# EAGLE board transmiter switch (EAGLE 6.5.0)
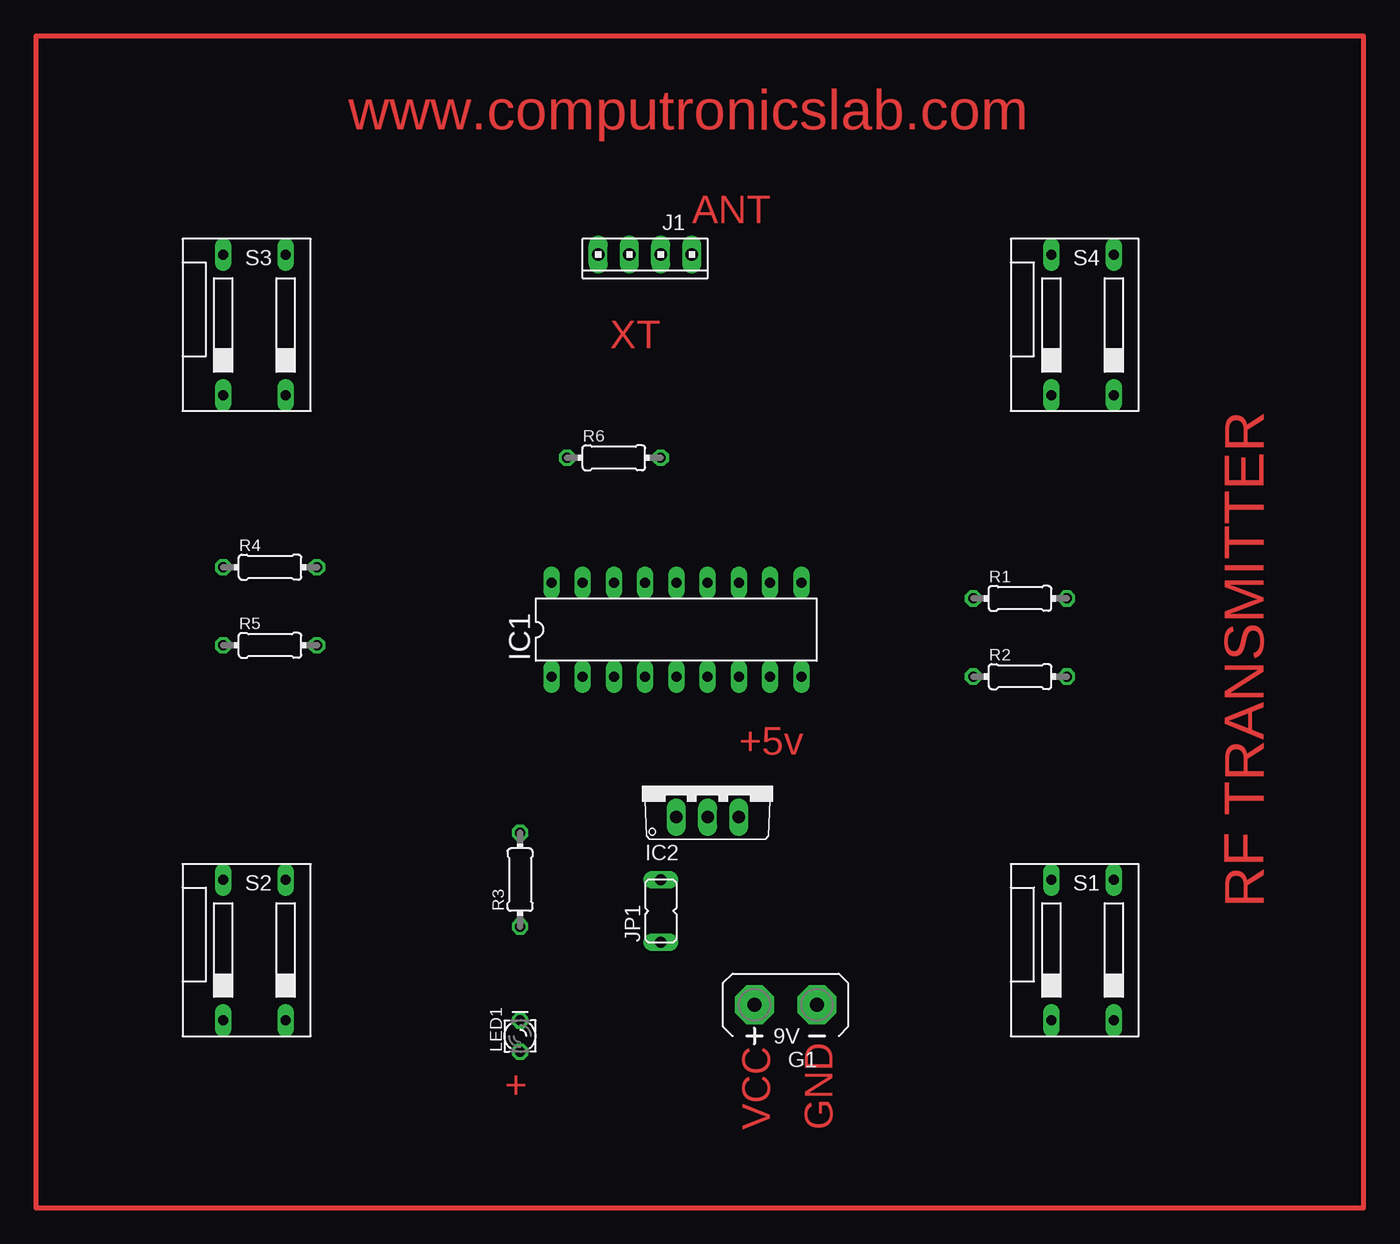
[diagram p0: board, top side]
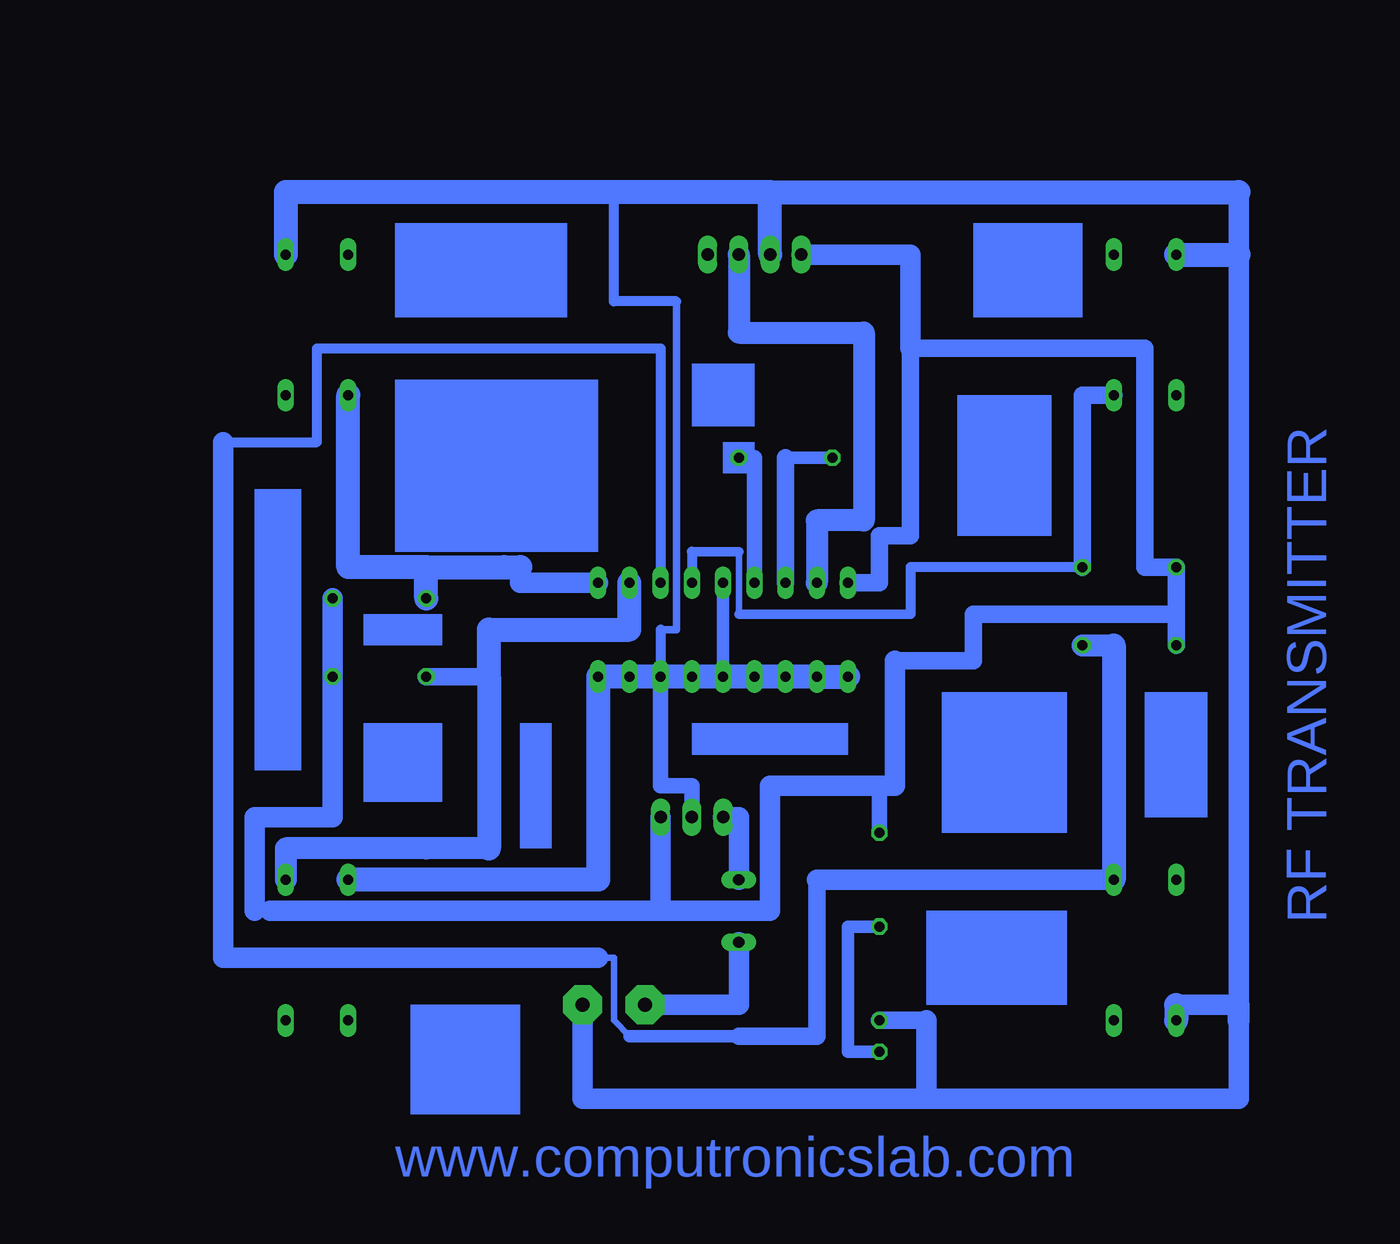
[diagram p1: board, bottom side, seen from below]

No outline drawn. Coordinates in mm, seen from the top.
Copper layers (1*16): Top 0.035mm / dielectric 1.5mm / Bottom 0.035mm
Design rules "default": minimum track width 10mil, minimum drill 24mil, track to track 8mil, track to pad 8mil, pad to pad 8mil, via to via 8mil, smd to smd 8mil, copper to edge 40mil, drill to drill 8mil, minimum pad ring 10mil, minimum via ring 8mil, stop-mask expansion 4mil, vias tented up to drill 0mil, thermal gap 10mil

## Footprints (pad centres in the part's own frame; a part is rotated, then mirrored left to right if it is on the bottom)
AB9V = drill 1.118 pad 3.15 octagon: + 0,2.54; - 0,-2.54
DIL18 = drill 0.813 long: 1 -10.16,-3.81; 2 -7.62,-3.81; 3 -5.08,-3.81; 4 -2.54,-3.81; 5 0,-3.81; 6 2.54,-3.81; 7 5.08,-3.81; 8 7.62,-3.81; 9 10.16,-3.81; 10 10.16,3.81; 11 7.62,3.81; 12 5.08,3.81; 13 2.54,3.81; 14 0,3.81; 15 -2.54,3.81; 16 -5.08,3.81; 17 -7.62,3.81; 18 -10.16,3.81
TO220V = drill 1.016 long: 1 -2.54,-2.54; 2 0,-2.54; 3 2.54,-2.54
10X04MTA = drill 1.016 long: 1 3.81,0; 2 1.27,0; 3 -1.27,0; 4 -3.81,0
JP1 = drill 0.914 long: 1 0,-2.54; 2 0,2.54
LED_LD260 = drill 0.813 octagon: A -1.27,0; K 1.27,0
0204/7 = drill 0.813 octagon: 1 -3.81,0; 2 3.81,0
DS-02 = drill 0.813 long: 1 -5.08,-5.08; 2 0,-5.08; 3 0,6.35; 4 -5.08,6.35

## Placement (x,y rotation side)
G1  AB9V  [AB9V]  57.15,11.43 90 top
IC1  HT12E  [DIL18]  48.26,41.91 0 top
IC2  7805TV  [TO220V]  50.8,29.21 0 top
J1  transmitter  [10X04MTA]  45.72,72.39 180 top
JP1  jumper  [JP1]  46.99,19.05 0 top
LED1  5mm  [LED_LD260]  35.56,8.89 90 top
R1  1k  [0204/7]  76.2,44.45 0 top
R2  1k  [0204/7]  76.2,38.1 0 top
R3  330E  [0204/7]  35.56,21.59 90 top
R4  1k  [0204/7]  15.24,46.99 0 top
R5  1k  [0204/7]  15.24,40.64 0 top
R6  1ME  [0204/7]  43.18,55.88 0 top
S1  push switch 1  [DS-02]  83.82,15.24 0 top
S2  push switch2  [DS-02]  16.51,15.24 0 top
S3  push switch 3  [DS-02]  16.51,66.04 0 top
S4  push switch 4  [DS-02]  83.82,66.04 0 top

## Library data of the parts
G1 = battery
IC1 = microchip
IC2 = linear
J1 = con-amp
JP1 = jumper
LED1 = eagle-ltspice; SPICEMODEL: NONE; SPICEPREFIX: D; SPICETYPE: diode
R1-R6 = eagle-ltspice; SPICEMODEL: NONE; SPICEPREFIX: R
S1-S4 = switch-dil; OC_FARNELL: 9472126; OC_NEWARK: unknown

## Nets
N$1: LED1.A R3.1
N$2: IC1.10 R1.1 S4.1
N$3: IC1.11 R2.1 S1.3
N$4: IC1.12 R5.2 S2.3
N$5: IC1.13 R4.2 S3.2
N$6: IC1.16 R6.1
N$7: IC1.15 R6.2
N$8: IC1.18 IC2.3 J1.1 R1.2 R2.2 R3.2 R4.1 R5.1
N$9: IC1.17 J1.3
N$10: G1.- IC1.1 IC1.2 IC1.3 IC1.4 IC1.5 IC1.6 IC1.7 IC1.8 IC1.9 IC1.14 IC2.2 J1.2 LED1.K S1.4 S2.1 S3.4 S4.3
N$11: G1.+ JP1.1
N$13: IC2.1 JP1.2

## Tracks (layer width: path | path; a pad name or v marks a point on that pad's centre or on a via)
N$1
  Bottom 1.016: LED1.A 38.1,7.62 38.1,17.78 R3.1
N$2
  Bottom 1.676: IC1.10 64.77,45.72 64.77,46.99
  Bottom 1.93: R1.1 72.39,46.99 | 72.39,46.99 66.04,46.99 64.77,46.99 | 72.39,46.99 78.74,46.99 S4.1
N$3
  Bottom 1.422: R2.1 67.31,38.1
  Bottom 1.778: S1.3 83.82,24.13 72.39,24.13 67.31,24.13
  Bottom 1.93: IC1.11 55.88,41.91 67.31,41.91 67.31,38.1 67.31,24.13
N$4
  Bottom 0.508: 58.42,15.24 57.15,15.24 57.15,10.16 55.88,8.89
  Bottom 0.813: IC1.12 53.34,64.77 81.28,64.77 81.28,57.15 88.9,57.15
  Bottom 1.016: 46.99,8.89 55.88,8.89
  Bottom 1.422: 40.64,21.59 40.64,8.89 46.99,8.89
  Bottom 1.676: 88.9,57.15 88.9,15.24 58.42,15.24 | S2.3 40.64,21.59
  Bottom 1.778: R5.2 16.51,40.64
  Bottom 1.93: 16.51,40.64 S2.3
N$5
  Bottom 0.508: 46.99,43.18 46.99,48.26
  Bottom 0.762: 46.99,48.26 50.8,48.26 | 33.02,43.18 46.99,43.18
  Bottom 0.813: 50.8,48.26 IC1.13 | R4.2 33.02,46.99 33.02,43.18
  Bottom 1.422: R4.2 19.05,60.96 S3.2
N$6
  Bottom 1.016: R6.1 43.18,55.88
  Bottom 1.422: 43.18,55.88 IC1.16
N$7
  Bottom 0.254: R6.2 45.72,55.88
  Bottom 1.27: 45.72,55.88 IC1.15
N$8
  Bottom 0.254: 85.09,19.05 86.36,19.05
  Bottom 1.27: 35.56,29.21 R3.2
  Bottom 1.422: 11.43,43.18 R4.1 13.97,46.99 13.97,64.77 33.02,64.77 33.02,49.53 35.56,49.53 35.56,45.72 IC1.18 | 34.29,39.37 27.94,39.37 27.94,43.18 11.43,43.18 | 11.43,43.18 R5.1
  Bottom 1.676: R1.2 R2.2 80.01,26.67 86.36,26.67 86.36,19.05 | J1.1 33.02,72.39 33.02,67.31 33.02,64.77 | 53.34,19.05 85.09,19.05 | 34.29,39.37 34.29,29.21 35.56,29.21 44.45,29.21 44.45,19.05 53.34,19.05 | 53.34,19.05 IC2.3
N$9
  Bottom 1.778: IC1.17 40.64,50.8 36.83,50.8 36.83,66.04 46.99,66.04 J1.3
N$10
  Bottom 0.254: 6.35,20.32 6.35,19.05
  Bottom 0.61: 53.34,41.91 52.07,41.91 52.07,68.58
  Bottom 0.813: 52.07,68.58 57.15,68.58 57.15,77.47 | 53.34,41.91 IC1.7
  Bottom 1.016: IC1.5 IC1.14
  Bottom 1.27: 53.34,36.83 IC1.7 53.34,29.21 50.8,29.21 IC2.2
  Bottom 1.422: 31.75,10.16 LED1.K
  Bottom 1.676: 31.75,10.16 31.75,3.81 | 31.75,3.81 6.35,3.81 6.35,10.16 | G1.- 59.69,3.81 31.75,3.81 | 6.35,77.47 6.35,72.39 6.35,20.32 6.35,11.43 11.43,11.43
  Bottom 1.778: 6.35,10.16 6.35,11.43
  Bottom 1.93: IC1.1 IC1.2 IC1.3 IC1.4 IC1.5 IC1.6 IC1.7 IC1.8 IC1.9 58.42,21.59 S1.4 | 44.45,77.47 6.35,77.47 | J1.2 44.45,77.47 | 44.45,77.47 57.15,77.47 83.82,77.47 S4.3 | 11.43,11.43 S2.1 | S3.4 6.35,72.39
N$11
  Bottom 1.676: G1.+ 46.99,11.43 JP1.1
N$12
  Top 0.406: -3.81,90.17 -3.81,-5.08 104.14,-5.08 104.14,90.17 -3.81,90.17
N$13
  Bottom 1.676: JP1.2 46.99,26.67 IC2.1
(copper drawn outside any net)
  shapes: Bottom area x15

## Text on the board
Top: www.computronicslab.com | ANT | TX | RF TRANSMITTER | +5v | + | VCC | GND
Bottom: RF TRANSMITTER | www.computronicslab.com